# Allegro board DS-6-VOICE-2023122301.brd
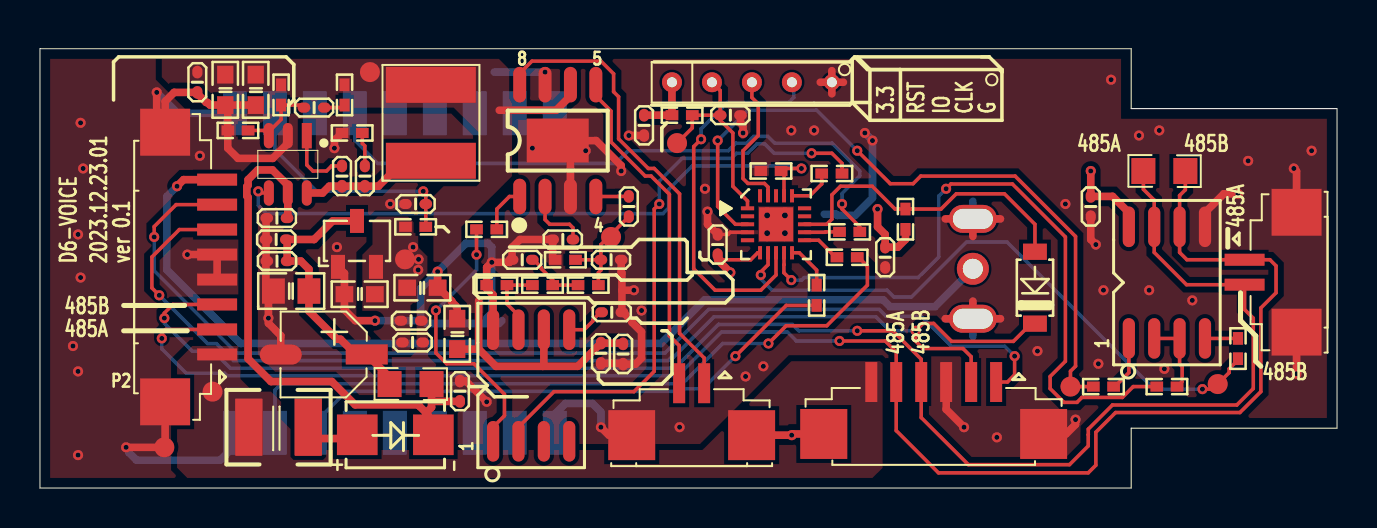
[diagram p0: board, top side]
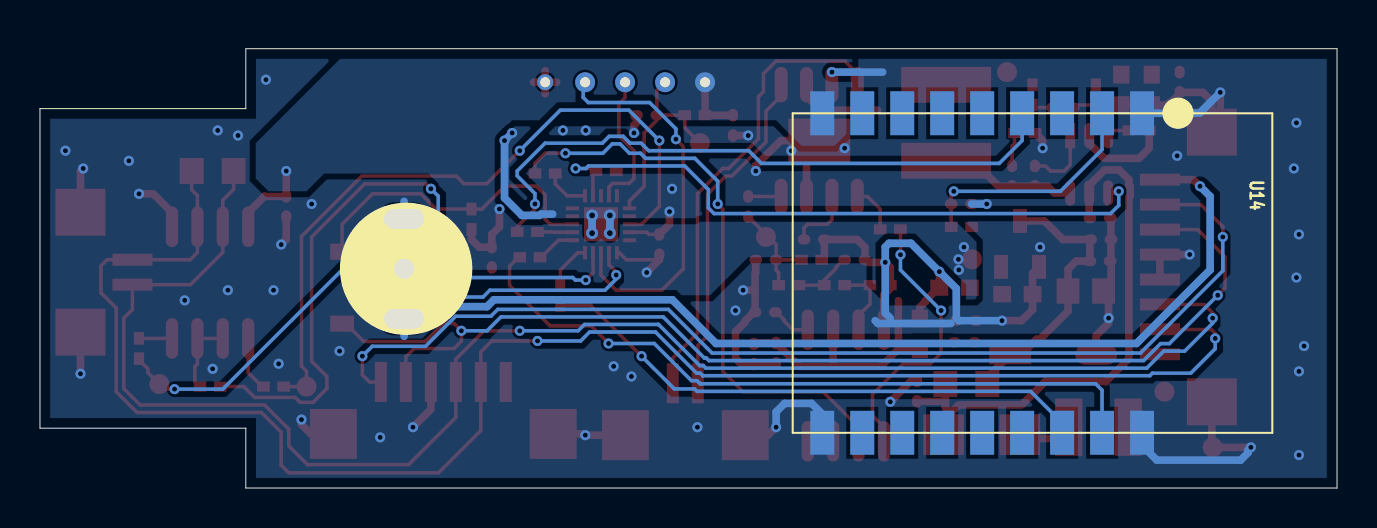
[diagram p1: board, bottom side, seen from below]

Outline 64.9 x 22 mm; copper layers: TOP, BOTTOM. Coordinates in mm from the lower left corner of the outline.
Outline path: 0,22 0,0 54.6,0 54.6,3 64.9,3 64.9,19 54.6,19 54.6,22 0,22

## Design rules (mm)
net group POWER: nets BAT+ CH+ N1536653 N1536963 N1552510

## Placement (name value [footprint] x y rotation side)
A  TP_0.8mm  [TP_10]  28.57 12.57 0 top
C1  102  [C0402]  16.26 15.62 90 top
C2  104  [C0402]  11.82 12.45 180 top
C3  104  [C0402]  15.11 15.62 90 top
C4  104  [C0402]  11.86 11.36 180 top
C5  22uF/6.3V  [C0603]  19.13 10.03 0 top
C6  22uF/6.3V  [C0603]  16 9.71 180 top
C7  103  [C0402]  18.57 8.38 0 top
C8  104  [C0402]  18.64 7.29 0 top
C9  22uF  [C0603]  10.79 19.94 90 top
C10  22uF  [C0603]  9.27 19.94 90 top
C11  104  [C0402]  7.87 20.32 270 top
C12  101  [C0402]  13.72 19.05 180 top
C13  104  [C0402]  11.85 13.52 180 top
C15  104  [C0402]  21.01 4.85 90 top
C17  102  [C0402]  24.13 11.43 180 top
C18  102  [C0402]  28.57 11.43 0 top
C19  102  [C0402]  28.61 8.8 0 top
C20  104  [C0402]  28.07 6.75 270 top
C21  105  [C0402]  29.18 6.71 270 top
C22  22uF  [C0603]  20.88 7.72 90 top
C23  105  [C0402]  26.16 12.45 180 top
C24  104  [C0402]  29.46 14.1 270 top
C26  105  [C0402]  30.23 18.16 270 top
C27  104  [C0402]  34.54 18.67 180 top
C54  105  [C0402]  42.29 11.56 270 top
C55  105  [C0402]  52.58 14.1 270 top
C56  103  [C0402]  33.91 12.19 90 top
C57  104  [C0402]  18.8 14.22 0 top
D1  ST34F  [SMA]  17.78 2.67 180 top
D9  IN5819WS  [SOD123]  49.78 10.03 90 top
EC1  4.7UF/25V  [C0805]  12.57 9.86 180 top
EC2  10UF/35V  [CAP_SMD_040X054]  14.2 6.69 0 top
F1  1100mA/16V  [1210]  11.94 3.05 0 top
GND  TP_0.8mm  [TP_10]  6.22 2.04 0 top
L1  4.7UH L_CD43 5A  [L_CD43]  19.56 18.29 90 top
P1  con_125_02_v  [CON_125_02P_WT_H]  60.27 10.81 90 top
P2  con_125_08_v  [CON_125_08P_WT_H]  8.86 9.82 270 top
P3  th_2p_20  [CX1210M]  46.68 13.48 180 bottom
P5  con_125_06_V  [CON_125_06P_WT_H]  44.72 5.31 0 top
P9  HEADER 5  [DEBUG5_DIP]  31.62 20.32 0 top
P10  con_125_02_v  [CON_125_02P_WT_H]  32.61 5.25 0 top
PO  TP_0.8mm  [TP_10]  8.64 4.83 0 top
R1  100R  [R0805]  18.54 5.21 0 top
R2  22R  [R0402]  15.62 17.78 0 top
R6  68K  [R0402]  12.07 19.68 270 top
R8  9.1K  [R0402]  9.91 17.91 180 top
R9  2K  [R0402]  15.24 19.68 270 top
R10  100K  [R0402]  36.58 15.88 180 top
R13  10K  [R0402]  27.43 10.16 0 top
R14  470R  [R0402]  22.86 10.16 0 top
R15  4.7K  [R0402]  25.15 10.16 0 top
R16  2K  [R0402]  26.29 11.43 0 top
R22  100R  [R0402]  40.39 11.56 0 top
R41  10R  [R0402]  59.94 6.98 270 top
R72  10R  [R0402]  56.39 5.08 180 top
R73  10R  [R0402]  53.21 5.08 180 top
R74  120R  [R0805]  56.26 15.88 0 top
R85  100R  [R0402]  38.86 9.65 270 top
R86  100R  [R0402]  40.51 12.83 180 top
R87  10K  [R0402]  18.8 13.08 0 top
R88  10K  [R0402]  43.31 13.46 90 top
R89  10K  [R0402]  32.13 18.67 180 top
R90  100R  [R0402]  39.62 15.75 0 top
R91  100R  [R0402]  22.35 12.95 180 top
RST  TP_0.8mm  [TP_10]  31.88 17.27 0 top
RX  TP_0.8mm  [TP_10]  51.56 5.08 0 top
TX  TP_0.8mm  [TP_10]  58.93 5.21 0 top
U1  LR2010B-T33  [SOT_23]  15.86 12.38 0 top
U2  JW5057S/DIO6913  [SOT23_6]  12.4 16.21 270 top
U3  WT588F02B-B2  [SO_8]  24.58 5.14 90 top
U5  WT8871  [ESOP_8]  25.91 17.4 0 top
U12  CS48505S  [SO_8]  56.39 10.29 90 top
U13  HK32F0301MF4N7C  [QFN020Q_P040_035X035]  36.83 13.21 270 top
U14  8138  [C8138-MU]  9.76 18.77 270 bottom
UNK3  TP_0.8mm  [TP_10]  18.27 11.45 0 top
UNK5  TP_0.8mm  [TP_10]  16.51 20.83 0 top

## Library data of the parts
A GND PO RST RX TX UNK3 UNK5 = TestPoint
C1-C13 C15 C17-C24 C26 C27 C54-C57 EC1 EC2 = C_0
D1 = ZHCS1000/SOT_10
D9 = ZHCS1000/SOT_11
F1 = FUSE
L1 = L
P1 P10 = HEADER 2_6
P2 = HEADER 12_6
P3 = HEADER 2_7
P5 = HEADER 4_8
P9 = HEADER 4_9
R1 R2 R6 R8-R10 R13-R16 R22 R41 R72-R74 R85-R87 R89-R91 = R_0
R88 = R_1
U1 = UPC2746T/SOT_5
U2 = LM3875/TO220_2
U3 = BA3430F/SO_5
U5 = LM3875/TO220_11
U12 = LM3875/TO220_6
U13 = BA3430F/SO_14
U14 = BA3430F/SO_12

## Footprints (pads in the part's own frame, mm; a bottom-side part is the same pattern mirrored in y, then rotated)
1210
  custom 1.372x2.87 smd: 1(-1.486,0) 2(1.486,0)
C0402
  oval 0.635x0.508 smd: 1(-0.508,0) 2(0.508,0)
C0603
  rect 0.889x0.813 smd: 1(-0.762,0) 2(0.762,0)
C0805
  rect 1.143x1.27 smd: 1(-0.889,0) 2(0.889,0)
C8138-MU
  rect 2.2x1.2 smd: 1(0,0) 2(0,-2) 3(0,-4) 4(0,-6) 5(0,-8) 6(0,-10) 7(0,-12) 8(0,-14) 9(0,-16) 10(16,-16) 11(16,-14) 12(16,-12) 13(16,-10) 14(16,-8) 15(16,-6) 16(16,-4) 17(16,-2) 18(16,0)
CAP_SMD_040X054
  rect 2.1x1 smd: 1(2.153,-0.004)
  oval 2.1x1 smd: 2(-2.148,-0.01)
CON_125_02P_WT_H
  rect 0.6x2 smd: 1(0.625,0) 2(-0.625,0)
  rect 2.35x2.5 smd: 3(-3,-2.6) 4(3,-2.6)
CON_125_06P_WT_H
  rect 0.6x2 smd: 1(3.125,0) 2(1.875,0) 3(0.625,0) 4(-0.625,0) 5(-1.875,0) 6(-3.125,0)
  rect 2.35x2.5 smd: 7(5.5,-2.6) 8(-5.5,-2.6)
CON_125_08P_WT_H
  rect 0.6x2 smd: 1(3.125,0) 2(1.875,0) 3(0.625,0) 4(-0.625,0) 5(-1.875,0) 6(-3.125,0) 7(-4.375,0) 8(-5.625,0)
  rect 2.35x2.5 smd: 9(-8,-2.6) 10(5.5,-2.6)
CX1210M
  oval 2.4x1.4 hole 2x1: 1(0,0) 2(0,-5)
  round 1.6 hole 1: 3(0,-2.5)
DEBUG5_DIP
  round 1 hole 0.5: 1(0,0) 2(2,0) 3(4,0) 4(6,0)
  round 0.8 hole 0.5: 5(8,0)
ESOP_8
  oval 0.65x1.78 smd: 1(-1.905,-2.8) 2(-0.635,-2.8) 3(0.635,-2.8) 4(1.905,-2.8) 5(1.905,2.8) 6(0.635,2.8) 7(-0.635,2.8) 8(-1.905,2.8)
  rect 3.1x2.2 smd: EP(0,0)
L_CD43
  rect 1.8x4.5 smd: 1(-1.9,0) 2(1.9,0)
QFN020Q_P040_035X035
  rect 0.197x0.66 smd: 1(-0.8,-1.427) 2(-0.4,-1.427) 3(0,-1.427) 4(0.4,-1.427) 5(0.8,-1.427) 11(0.8,1.427) 12(0.4,1.427) 13(0,1.427) 14(-0.4,1.427) 15(-0.8,1.427)
  rect 0.66x0.197 smd: 6(1.427,-0.8) 7(1.427,-0.4) 8(1.427,0) 9(1.427,0.4) 10(1.427,0.8) 16(-1.427,0.8) 17(-1.427,0.4) 18(-1.427,0) 19(-1.427,-0.4) 20(-1.427,-0.8)
  rect 1.7x1.7 smd: 21(0,0)
R0402
  rect 0.635x0.508 smd: 1(-0.508,0) 2(0.508,0)
R0805
  rect 1.2x1.3 smd: 1(-1.05,0) 2(1.05,0)
SMA
  rect 2.032x2.032 smd: A(1.905,0) C(-1.905,0)
SO_8
  oval 2.032x0.61 smd: 1(-2.794,1.905) 2(-2.794,0.635) 3(-2.794,-0.635) 4(-2.794,-1.905) 5(2.794,-1.905) 6(2.794,-0.635) 7(2.794,0.635) 8(2.794,1.905)
SOD123
  rect 0.813x1.194 smd: 1(-1.8,0) 2(1.8,0)
SOT23_6
  rect 1.27x0.5 smd: 1(-1.435,0.95)
  oval 1.27x0.5 smd: 2(-1.435,0) 3(-1.435,-0.95) 4(1.435,-0.95) 5(1.435,0) 6(1.435,0.95)
SOT_23
  rect 0.7x1.2 smd: 1(-0.95,-1.3) 2(0.95,-1.3) 3(0,1)
TP_10
  round 1 smd: 1(0,0)

## Nets
+3.3V: C5.1(A) C6.1(A) C7.1(A) C8.1(A) C26.1(A) C54.1(A) C55.1(A) C56.1(A) P9.1 R87.1(A) R88.1(A) R89.2(B) U1.2(VOUT) U12.8(VCC) U13.6(VDD) U14.9(3V3) UNK3.1
+5VSB: C9.2(B) C10.2(B) C11.1(A) C20.1(A) C21.1(A) C22.1(A) L1.2(B) R6.1(A) R9.1(A) U3.6(VDD) U5.6(VDD) UNK5.1
485A: P1.1 P2.2 P5.5 R74.2(B) U12.6(A)
485B: P1.2 P2.3 P5.4 R74.1(A) U12.7(B)
B-: C2.2(B) C4.2(B) C5.2(B) C6.2(B) C7.2(B) C8.2(B) C9.1(A) C10.1(A) C11.2(B) C13.2(B) C15.2(B) C17.2(B) C18.2(B) C19.2(B) C20.2(B) C21.2(B) C22.2(B) C23.2(B) C26.2(B) C27.1(A) C54.2(B) C55.2(B) C56.2(B) C57.1(A) EC1.2(B) EC2.2(B) GND.1 P1.3 P1.4 P2.4 P2.5 P2.9 P2.10 P3.1 P3.2 P5.3 P5.7 P5.8 P9.5 P10.3 P10.4 R2.1(A) R8.2(B) R10.2(B) R14.1(A) R16.1(A) U1.1(GND) U2.2(GND) U3.8(GND) U5.3(INA+/MODE) U5.7(GND) U5.EP U12.5(GND) U13.4(VSS) U13.21(PG) U14.1(GND0) U14.10(GND1) U14.18(GND3)
BAT+: C13.1(A) C15.1(A) D1.C(CATHODE) R1.2(B) U2.5(VIN)
BUSY: R91.1(A) U5.1(SHUTDOWN)
CH+: P2.8 P3.3
DAC: A.1 C18.1(A) C24.2(B) R13.2(B) R16.2(B)
DR: R72.2(B) U13.9(PB4)
EN_5V: R10.1(A) U2.4(EN) U13.17(PD3/A3)
IN_K11: D9.2(ANODE) R88.2(B) U13.13(PC6/A6)
K10: P2.7 P5.1
K11: D9.1(CATHODE) P2.6 P5.2
PWR_OUT: F1.1 P2.1 P5.6 PO.1
REST: C27.2(B) P9.2 R89.1(A) RST.1 U13.1(PA0/NRST)
SPK+: P10.1 U5.8(VO2/VOP)
SPK-: P10.2 U5.5(VO1/VON)
SWCLK: P9.4 U13.8(PB5/SWCLK)
SWDIO: P9.3 U13.19(PD5/SWDIO/A0)
U1_RX: R73.2(B) RX.1 U13.3(PA2)
U1_TX: R41.2(B) TX.1 U13.7(PA3)
U2_RX: R22.1(A) U13.11(PC4/A2)
U2_TX: R85.1(A) U13.10(PC3)
VOICE: R90.1(A) U13.16(PD2/A4)
W_EN: R86.2(B) U13.12(PC5)
W_RST: C57.2(B) R87.2(B) U14.2(RST)
N1534729: R41.1(A) U12.4(DI)
N1534781: R72.1(A) U12.2(RE#) U12.3(DE)
N1534911: R73.1(A) U12.1(RO)
N1536653: C2.1(A) C4.1(A) EC1.1(A) EC2.1(A) R1.1(A) U1.3(VDD)
N1536963: D1.A(ANODE) F1.2
N1550567: C19.1(A) U3.5(PWMN)
N1550901: C23.1(A) U5.2(BYPASS)
N1550991: C24.1(A) U5.4(INA-/IN)
N1551071: R14.2(B) R15.1(A) U3.7(PWMP/DAC)
N1551091: C17.1(A) R13.1(A) R15.2(B)
N1552506: C3.2(B) U2.1(BST)
N1552510: C1.1(A) C3.1(A) L1.1(A) U2.6(SW)
N1552544: C12.2(B) R6.2(B) R8.1(A) U2.3(FB)
N1552786: C1.2(B) R2.2(B)
N1552812: C12.1(A) R9.2(B)
N1644055: U13.2(PA1)
N1716448: R22.2(B) U14.17(2TX)
N1716498: R85.2(B) U14.16(2RX)
N1716596: R86.1(A) U14.4(EN)
N1755624: R90.2(B) U3.2(PC1/SO)
N1755761: R91.2(B) U3.1(PC2/CS)

Pads without a net: U3 3 4; U13 5 14 15 18 20; U14 3 5 6 7 8 11 12 13 14 15

## Via types
v1: diameter 0.508, hole 0.254, TOP to BOTTOM, 89 vias
v2: diameter 0.6, hole 0.3, TOP to BOTTOM, 4 vias

## Routing (per net, layer and track width the routed paths; a pad name or vN(x,y) marks a point on that pad's centre or on a via; arc(x,y) is an arc through that point)
+3.3V: length 14.5
  TOP w0.178: C56.1 34.16,11.43 35.56,11.43 35.91,11.78 U13.6
  TOP w0.381: R88.1 43.31,12.45 42.93,12.07 42.29,12.07 42.29,12.7 41.91,13.08 v1(41.91,13.97) ; P9.1 R89.2 C26.1 ; U12.8 54.48,13.79 53.67,14.61 C55.1 v1(52.58,15.88) ; C56.1 33.91,11.43 v1(34.54,10.79)
  vias: v1(18.67,12.07) v1(18.94,11.45) v1(18.92,10.92)
+5VSB: length 17.9
  TOP w0.381: 22.98,18.92 25.83,18.92 26.54,19.63 U5.6 ; 21.95,6.96 C22.1 ; 21.95,6.96 21.95,9.38 ; 21.95,6.96 22.81,6.1 25.16,6.1 ; C21.1 29.14,7.26 C20.1 26.91,6.1 25.16,6.1 ; U3.6 25.21,6.15 25.16,6.1
485A: length 83.9
  TOP w0.178: v1(40.01,7.37) 42.29,7.37 42.84,6.81 P5.5 42.84,2.88 44.96,0.76 52.45,0.76 52.83,1.14 52.83,2.79 53.82,3.78 60.04,3.78 61.09,4.83 61.09,9.02 61.85,9.78 61.85,11.13 61.54,11.43 P1.1 57.39,11.43 57.02,11.8 U12.6 57.02,14.65 57.31,14.94 R74.2 ; P2.2 6.29,7.94 6.1,7.75 v1(6.1,7.49)
  BOTTOM w0.178: v1(40.01,7.37) 37.85,7.37 37.4,7.81 34.1,7.81 32.04,5.75 31.87,5.75 31.74,5.63 9.37,5.63 9.24,5.75 7.31,5.75 6.1,6.97 v1(6.1,7.49)
485B: length 81.2
  TOP w0.178: v1(40.89,7.87) 42.67,7.87 44.09,6.45 P5.4 44.09,3.53 46.45,1.17 51.51,1.17 52.45,2.11 52.45,2.67 52.45,2.67 52.45,2.95 53.66,4.16 59.89,4.16 60.71,4.98 60.71,8.51 60.27,8.94 P1.2 57.37,10.18 55.75,11.8 U12.7 55.75,14.42 55.21,14.96 R74.1 ; P2.3 6.65,9.19 6.22,8.76 v1(6.22,8.51)
  BOTTOM w0.178: v1(40.89,7.87) 37.97,7.87 37.66,8.19 33.97,8.19 33.95,8.19 31.89,6.13 31.71,6.13 31.58,6 10.54,6 9.52,6 8.67,6.85 7.62,6.85 6.22,8.26 v1(6.22,8.51)
B-: length 144.7
  TOP w0.178: U13.4 34.54,12.81 34.43,12.7 C56.2
  TOP w0.381: 29.12,9.91 29.12,10.77 29.08,10.81 C18.2 ; 29.12,9.91 C19.2 29.18,8.8 29.62,8.36 29.62,8.3 30.1,7.82 30.1,6.5 29.8,6.21 C21.2 29.14,6.24 C20.2 ; 29.12,9.91 v1(29.72,9.91) ; C9.1 C10.1 ; C10.1 8.51,19.18 8.38,19.31 8.31,19.31 7.87,19.75 C11.2 6.71,19.81 6.26,19.36 6.26,17.82 5.84,18.24 v1(5.84,19.81) ; C10.1 9.4,19.05 R8.2 9.4,17.02 9.91,16.51 11.65,16.51 12.4,17.26 U2.2 ; v1(19.9,10.84) C5.2 19.94,10.03 20.6,9.37 20.6,9.33 20.88,9.05 C22.2 ; P1.4 62.87,15.87 v1(62.74,16) ; v1(16.76,8.38) 15.78,8.38 15.23,8.93 C6.2 15.23,10.75 U1.1 ; v1(46.24,3.05) 45.34,3.94 P5.3 ; C15.2 21.31,5.36 v1(22.35,4.32) ; 39.62,19.74 P9.5 ; P9.5 39.62,20.9 ; P9.5 39.04,20.32 ; P9.5 40.2,20.32 ; v1(33.4,13.84) 33.4,13.21 C56.2 ; R2.1 14.73,17.4 v1(14.73,17.02) ; v1(29.08,15.88) 29.08,16.14 27.83,17.4 U5.EP 26.54,16.76 U5.3 ; EC2.2 12.05,7.63 11.43,8.26 v1(11.43,8.51) 11.43,9.61 EC1.2 11.6,9.86 11.3,10.16 11.3,11.32 C4.2 11.31,11.41 11.31,13.48 C13.2 ; 45.3,8.48 P3.2 ; P3.2 48.06,8.48 ; P3.2 46.68,9.36 ; C26.2 v1(29.46,17.65) ; P1.3 v1(62.87,5.72) ; 6.26,4.32 6.26,2.08 GND.1 v1(4.31,2.04) ; U12.5 58.29,13.79 59.23,14.73 v1(59.94,14.73) ; U3.8 22.67,9.67 22.35,9.99 R14.1 22.35,11.05 v1(22.61,11.3) 23.49,11.3 C17.2 23.62,12.05 24.02,12.45 C23.2 25.65,11.56 R16.1 ; P3.1 48.06,13.48 ; P3.1 46.68,12.6 ; P3.1 45.3,13.48 ; v1(7.37,11.69) P2.5 P2.4 ; P10.3 28.47,2.65 v1(28.07,3.05) ; P5.7 51.34,2.71 51.82,3.18 v1(51.82,3.43) ; P10.4 v1(37.61,2.65) 37.67,2.71 P5.8 ; v1(52.83,12.19) 52.58,12.45 C55.2 ; v1(35.18,17.78) 35.18,18.16 35.05,18.29 C27.1
  BOTTOM w0.381: 23.11,8.38 22.97,8.24 19.32,8.24 ; P3.2 48.06,8.48 ; P3.2 46.68,7.6 ; P3.2 45.3,8.48 ; P3.2 46.68,9.36 ; U14.10 25.76,3.7 26.29,4.24 27.64,4.24 28.07,3.81 v1(28.07,3.05) ; U14.1 6.89,18.77 v1(5.84,19.81) ; 46.68,14.36 P3.1 48.06,13.48 ; U14.18 9.76,2.14 9.02,1.4 4.83,1.4 4.45,1.78 4.45,1.9 v1(4.31,2.04) ; v1(41.28,17.78) v1(41.66,17.4) 41.66,14.52 40.78,13.65 39.9,13.65 39.83,13.72 39.24,13.72 ; v2(36.39,12.76) v2(36.39,13.65) ; 22.35,8.51 22.61,8.76 v1(22.61,11.3) 22.61,12.07 22.42,12.26 21.32,12.26 v1(19.9,10.84) 19.05,9.99 19.05,8.51 18.92,8.38 v1(16.76,8.38) ; v2(37.27,12.76) v2(37.27,13.65) ; v1(25.27,20.83) 22.73,20.83 ; C57.1 v1(17.53,14.22)
  vias: v1(1.65,7.11) v1(1.9,12.7) v1(1.9,5.84) v1(1.9,1.65) v1(2.03,18.29) v1(2.03,10.54) v1(2.16,16) v1(8,16.64) v1(14.86,12.07) v1(24.64,17.02) v1(27.3,16.89) v1(30.1,8.89) v1(32,3.05) v1(33.27,14.99) v1(35.31,5.59) v1(36.2,6.1) v1(37.59,17.91) v1(38.73,17.91) v1(47.88,2.54) v1(49.91,6.86) v1(51.31,14.22) v1(52.96,6.22) v1(53.21,9.91) v1(53.59,20.45) v1(54.99,17.65) v1(55.5,9.91) v1(56.01,17.91) v1(56.26,5.97) v1(57.66,9.4) v1(60.45,16.38) v1(63.63,16.89)
BAT+: length 27.5
  TOP w0.381: C15.1 21.01,4.34 19.59,4.34 ; C13.1 12.4,13.56 U2.5 12.4,15.16 11.63,15.93 10.9,15.93 10.41,15.44 10.41,15.16 10.35,15.1 10.35,14.62 10.41,14.56 10.41,6.48 11.56,5.33 14.61,5.33 15.77,4.17 18.93,4.17 18.98,4.11 18.98,4.11 19.3,3.79 19.3,3.75 ; 19.3,3.75 19.43,3.62 19.43,2.92 D1.C ; 19.3,3.75 19.59,4.04 19.59,4.34 ; 19.59,4.34 R1.2
BUSY: length 2.4
  TOP w0.178: U5.1 23.49,14.6 22.86,13.97 R91.1
CH+: length 50.2
  TOP w0.381: v1(6.86,15.11) 7.19,15.44 P2.8
  BOTTOM w0.381: v1(6.86,15.11) 6.35,14.61 6.35,10.92 10.03,7.24 31.07,7.24 33.26,9.43 42.19,9.43 42.53,9.08 44.78,9.08 P3.3
DAC: length 5.5
  TOP w0.178: 28.57,12.7 A.1 ; 28.57,12.7 28.07,12.19 C18.1 ; 28.57,12.7 C24.2 ; C18.1 28.07,10.91 27.94,10.78 R13.2 ; C18.1 R16.2
DR: length 34
  TOP w0.178: v1(45.34,14.99) 45.58,15.23 48.65,15.23 51.31,12.57 51.31,6.35 50.55,5.59 50.55,4.98 51.24,4.29 51.89,4.29 52.13,4.54 54.16,4.54 54.7,5.08 R72.2 ; v1(37.59,10.41) 37.22,10.78 37.22,11.18 37.23,11.18 U13.9
  BOTTOM w0.178: v1(37.59,10.41) 38.11,10.41 38.24,10.54 43.94,10.54 44.97,11.57 44.97,14.62 v1(45.34,14.99)
EN_5V: length 32.6
  TOP w0.178: v1(38.1,16) 37.21,16 R10.1 37.23,15.73 U13.17 ; v1(10.92,14.86) 11.01,14.77 U2.4
  BOTTOM w0.178: v1(10.92,14.86) 10.92,14.15 11.33,13.74 31.17,13.74 31.46,14.03 31.46,14.95 32.64,16.13 37.45,16.13 37.58,16 v1(38.1,16)
IN_K11: length 15.8
  TOP w0.178: U13.13 39.37,13.21 39.62,13.46 39.62,14.68 40.06,15.11 41.64,15.11 42.79,13.97 R88.2 45.09,13.97 45.85,14.73 48.26,14.73 49.78,13.21 D9.2
K10: length 54.5
  TOP w0.178: P5.1 48.41,5.31 48.77,5.67 v1(48.77,6.6) ; P2.7 6.81,14.19 5.71,13.09 v1(5.71,12.57)
  BOTTOM w0.178: v1(5.71,12.57) 5.71,10.88 9.83,6.76 10.23,6.76 31.27,6.76 31.55,7.04 33.46,8.95 41.99,8.95 42.33,8.6 44.1,8.6 45.61,7.1 48.27,7.1 v1(48.77,6.6)
K11: length 58
  TOP w0.178: P5.2 46.59,6.58 46.18,6.98 44.18,6.98 43.82,7.35 v1(43.82,7.87) 44.18,8.24 44.72,8.24 45.62,7.34 48.7,7.34 49.59,8.23 D9.1 ; v1(5.97,9.65) 5.6,10.02 5.6,11.57 6.97,12.94 P2.6
  BOTTOM w0.178: v1(43.82,7.87) 42.53,7.87 41.83,8.57 33.72,8.57 31.65,6.51 31.55,6.51 31.43,6.38 10.39,6.38 9.68,6.38 8.83,7.23 8.39,7.23 v1(5.97,9.65)
REST: length 10.2
  TOP w0.178: C27.2 34.04,18.41 34.67,17.78 34.67,15.11 35.4,14.37 U13.1 ; C27.2 34.04,19.91 P9.2 ; C27.2 R89.1 32.64,18.03 RST.1
SPK+: length 23.3
  TOP w0.178: U5.8 24,20.76 24.62,21.38 28.07,21.38 28.7,20.74 28.7,19.84 28.95,19.59 28.95,17.49 30.44,16 30.73,16 32,14.73 32,7.74 33.23,6.52 P10.1
SPK-: length 16.9
  TOP w0.178: U5.5 27.81,19.63 28.57,18.87 28.57,17.33 30.28,15.62 30.58,15.62 31.49,14.71 31.49,7.62 31.98,7.13 P10.2
SWCLK: length 19.2
  TOP w0.178: v1(33.08,17.47) 32.71,17.1 32.71,10.98 33.78,9.91 36.07,9.91 36.83,10.67 U13.8
  BOTTOM w0.178: v1(33.08,17.47) 33.08,17.99 34.4,19.3 37.47,19.3 37.72,19.56 37.72,20.22 P9.4
SWDIO: length 7.1
  TOP w0.178: P9.3 35.62,19.55 35.94,19.24 35.94,17.65 35.18,16.89 35.18,15.49 35.42,15.25 36.25,15.25 36.43,15.07 U13.19
U1_RX: length 35.4
  TOP w0.178: 52.71,5.08 RX.1 51.56,5.85 51.82,6.1 51.82,12.6 48.79,15.62 44.07,15.62 43.69,15.24 42.55,15.24 v1(40.89,16.89) ; U13.3 34.8,13.21 33.91,14.1 v1(33.91,17.4)
  BOTTOM w0.178: v1(40.89,16.89) 38.86,18.92 35.43,18.92 v1(33.91,17.4)
U1_TX: length 30.7
  TOP w0.178: R41.2 59.94,6.41 59.5,5.97 59.5,5.78 TX.1 58.67,4.95 v1(58.17,4.95) ; U13.7 36.43,11.18 36.07,10.82 v1(36.07,10.67)
  BOTTOM w0.178: v1(58.17,4.95) 55.75,4.95 48.39,12.32 46.36,12.32 43.6,9.56 42.73,9.56 42.39,9.91 36.63,9.91 36.07,10.46 v1(36.07,10.67)
U2_RX: length 2
  TOP w0.178: R22.1 39.81,11.56 38.96,12.41 U13.11
U2_TX: length 2.3
  TOP w0.178: U13.10 38,11.78 38.86,10.91 R85.1
VOICE: length 2.3
  TOP w0.178: U13.16 38.52,14.63 39.12,15.23 R90.1
W_EN: length 1.8
  TOP w0.178: R86.2 39.31,12.83 39.29,12.81 U13.12
W_RST: length 11.9
  TOP w0.178: R87.2 C57.2 19.3,14.73 v1(19.18,14.86)
  BOTTOM w0.178: U14.2 11.76,16.95 13.84,14.86 v1(19.18,14.86)
N1534729: length 1.7
  TOP w0.178: U12.4 R41.1
N1534781: length 3.8
  TOP w0.178: U12.2 U12.3 57.02,6.21 57.15,6.08 57.15,5.33 R72.1
N1534911: length 2.8
  TOP w0.178: U12.1 54.48,5.78 53.78,5.08 R73.1
N1536653: length 14.1
  TOP w0.381: R1.1 17.46,5.24 17.46,5.58 EC2.1 15.8,6.69 15.04,7.45 14.87,7.45 13.46,8.86 EC1.1 13.46,10.96 13.05,11.36 C4.1 12.37,12.41 C2.1 13.72,12.45 14.65,13.38 U1.3
N1536963: length 2.8
  TOP w0.381: F1.2 13.99,2.48 15.69,2.48 15.88,2.67
N1550567: length 2
  TOP w0.178: U3.5 27.23,7.93 27.67,8.37 27.67,8.43 28.04,8.8 C19.1
N1550901: length 3.3
  TOP w0.178: C23.1 26.67,13.03 26.49,13.21 25.51,13.21 25.27,13.44 25.27,14.6
N1550991: length 1.7
  TOP w0.178: U5.4 28.94,14.6 28.94,14.61 C24.1
N1551071: length 3.7
  TOP w0.178: U3.7 23.94,8.64 23.37,9.22 R14.2 R15.1
N1551091: length 3
  TOP w0.178: C17.1 24.7,11.43 25.07,11.06 25.07,11 25.65,10.41 R15.2 R13.1
N1552506: length 3.5
  TOP w0.178: C3.2 14.59,16.13 14.34,15.88 13.66,15.88 13.35,16.18 U2.1
N1552510: length 6.9
  TOP w0.381: L1.1 18.21,16.39 16.93,15.11 C1.1 C3.1 14.48,15.11 14.14,14.77 U2.6
N1552544: length 4.1
  TOP w0.178: C12.2 13.08,19.18 R6.2 12.07,18.46 11.45,17.84 U2.3 11.19,17.91 R8.1
N1552786: length 1.7
  TOP w0.178: R2.2 16.13,17.26 16.26,17.13 C1.2
N1552812: length 1.1
  TOP w0.178: C12.1 15.11,19.05 R9.2
N1716448: length 35.6
  TOP w0.178: R22.2 40.96,11.56 41.4,11.11 41.4,10.16 39.37,8.13 37.34,8.13 v1(36.45,7.24)
  BOTTOM w0.178: v1(36.45,7.24) 34.16,7.24 32.3,5.38 32.02,5.38 31.87,5.22 12.08,5.22 11.76,4.9 U14.17
N1716498: length 28
  TOP w0.178: v1(34.8,6.6) 37.34,9.14 R85.2
  BOTTOM w0.178: U14.16 13.76,3.27 15.33,4.84 32.02,4.84 32.15,4.97 33.16,4.97 v1(34.8,6.6)
N1716596: length 32.2
  TOP w0.178: v1(40.13,14.22) 40.13,13.97 41.02,13.08 R86.1
  BOTTOM w0.178: U14.4 15.76,17.4 16.9,16.26 28.8,16.26 29.43,16.89 34.44,16.89 34.69,17.14 34.82,17.27 35.37,17.27 35.72,17.61 36.42,17.61 36.76,17.27 39.63,17.27 41.02,15.88 41.02,15.63 40.13,14.74 v1(40.13,14.22)
N1755624: length 29.1
  TOP w0.178: v1(38.61,16.76) 39.62,16.76 40.13,16.26 R90.2 ; v1(30.99,14.22) 30.73,13.97 30.73,5.84 29.72,4.83 25.72,4.83 23.94,3.05 U3.2
  BOTTOM w0.178: v1(30.99,14.22) 30.99,15.37 32.13,16.51 34.6,16.51 34.85,16.76 35.4,16.76 35.87,17.23 36.26,17.23 36.73,16.76 v1(38.61,16.76)
N1755761: length 13.9
  TOP w0.178: v1(21.84,11.68) R91.2 ; U3.1 22.67,3.05 23.24,3.62 23.24,4.7 21.72,6.22 20.35,6.22 19.81,6.76 v1(19.81,8.89)
  BOTTOM w0.178: v1(19.81,8.89) 21.84,10.92 v1(21.84,11.68)

## Copper pours and planes (outline as drawn; the poured copper is in the pictures)
+3.3V on TOP: 16.89,13.59 18.41,13.59 18.92,13.08 18.92,12.07 19.43,11.56 19.43,10.79 18.92,10.29 18.92,9.4 18.8,9.27 18.67,9.27 18.54,9.14 18.54,6.98 18.41,6.86 17.65,6.86 16.13,8.38 16.13,11.68 16.64,12.19 16.64,13.34
+3.3V on BOTTOM: 19.43,8.13 18.03,9.53 18.03,12.32 19.05,13.34 31.88,13.34 32,13.21 39.88,13.21 41.91,15.24 41.91,17.78 41.28,18.41 28.07,18.41 26.8,17.14 25.15,17.14 24.26,18.03 24.26,21.49 49.88,21.49 54.1,17.27 54.1,15.49 53.47,14.86 51.56,14.86 50.67,15.75 45.47,15.75 44.96,15.24 44.96,11.81 42.8,9.65 31.37,9.65 29.46,11.56 23.24,11.56 23.24,10.29 21.08,8.13 ; 2 cut-outs
+5VSB on TOP: 21.46,8.76 19.68,10.54 19.68,14.61 20.19,15.11 21.84,15.11 21.97,15.24 21.97,17.78 20.7,19.05 7.62,19.05 6.1,20.57 6.1,21.49 22.96,21.49 23.62,20.83 23.62,15.62 21.08,13.08 21.08,11.56 21.72,10.92 22.35,10.92 23.11,10.16 23.11,9.02 22.86,8.76
B- on TOP: 0.51,0.51 0.51,21.49 54.09,21.49 54.09,18.49 64.39,18.49 64.39,3.51 54.09,3.51 54.09,0.51 ; 15 cut-outs
B- on BOTTOM: 16.51,9.14 16.51,7.75 23.37,7.75 23.37,9.14
B- on BOTTOM: 0.51,0.51 0.51,21.49 54.09,21.49 54.09,18.49 64.39,18.49 64.39,3.51 54.09,3.51 54.09,0.51 ; 2 cut-outs
PWR_OUT on TOP: 7.37,0.51 6.86,1.02 6.86,6.35 7.62,7.11 9.91,7.11 10.03,6.98 10.03,5.46 10.67,4.83 11.56,4.83 12.07,4.32 12.07,3.43 13.59,1.9 33.15,1.9 37.59,6.35 42.04,6.35 42.16,6.22 42.16,1.02 41.66,0.51

## Text on the board
Ref Des/Silkscreen Top: 485B | 485A | D6-VOICE | 2023.12.23.01 | ver 0.1 | 3.3 | RST | IO | CLK | G
DIMENSION: R1 | C6 | C28 | D7 | R26 | P5 | C17 | C8 | C18 | C24 | R19 | Q5 | D4 | C32 | R42 | RL1 | R41 | U1 | R31 | C19 | R16 | R27 | Q3 | U3 | R24 | R18 | C44 | C43 | R17 | R22 | EC1 | C15 | F2 | C29 | R23 | R21 | D2 | T12 | U2 | R25 | C10 | T13 | T11 | T2 | T5 | T3 | T6 | QL4 | T14 | C9 | P4 | C7
User.39: FIGURE | SIZE | 10.0 | 11.811 | 19.685 | 19.689 | 39.37 | 78.74x39.37 | DRILL CHART: TOP to BOTTOM | ALL UNITS ARE IN MILS | PLATED | QTY | 89 | 4 | 1 | 2
